# Altium PCB CoilGun_PCB.PcbDoc (part 2 of 2)
Units mm, origin at the board's own origin, x right, y up, seen from the top; angles counter-clockwise.
Board outline 78 x 72 mm, 2 copper layers (Top Layer, Bottom Layer), stack 1.594 mm thick; 79 components, 60 nets, 239 pads, 58 vias.
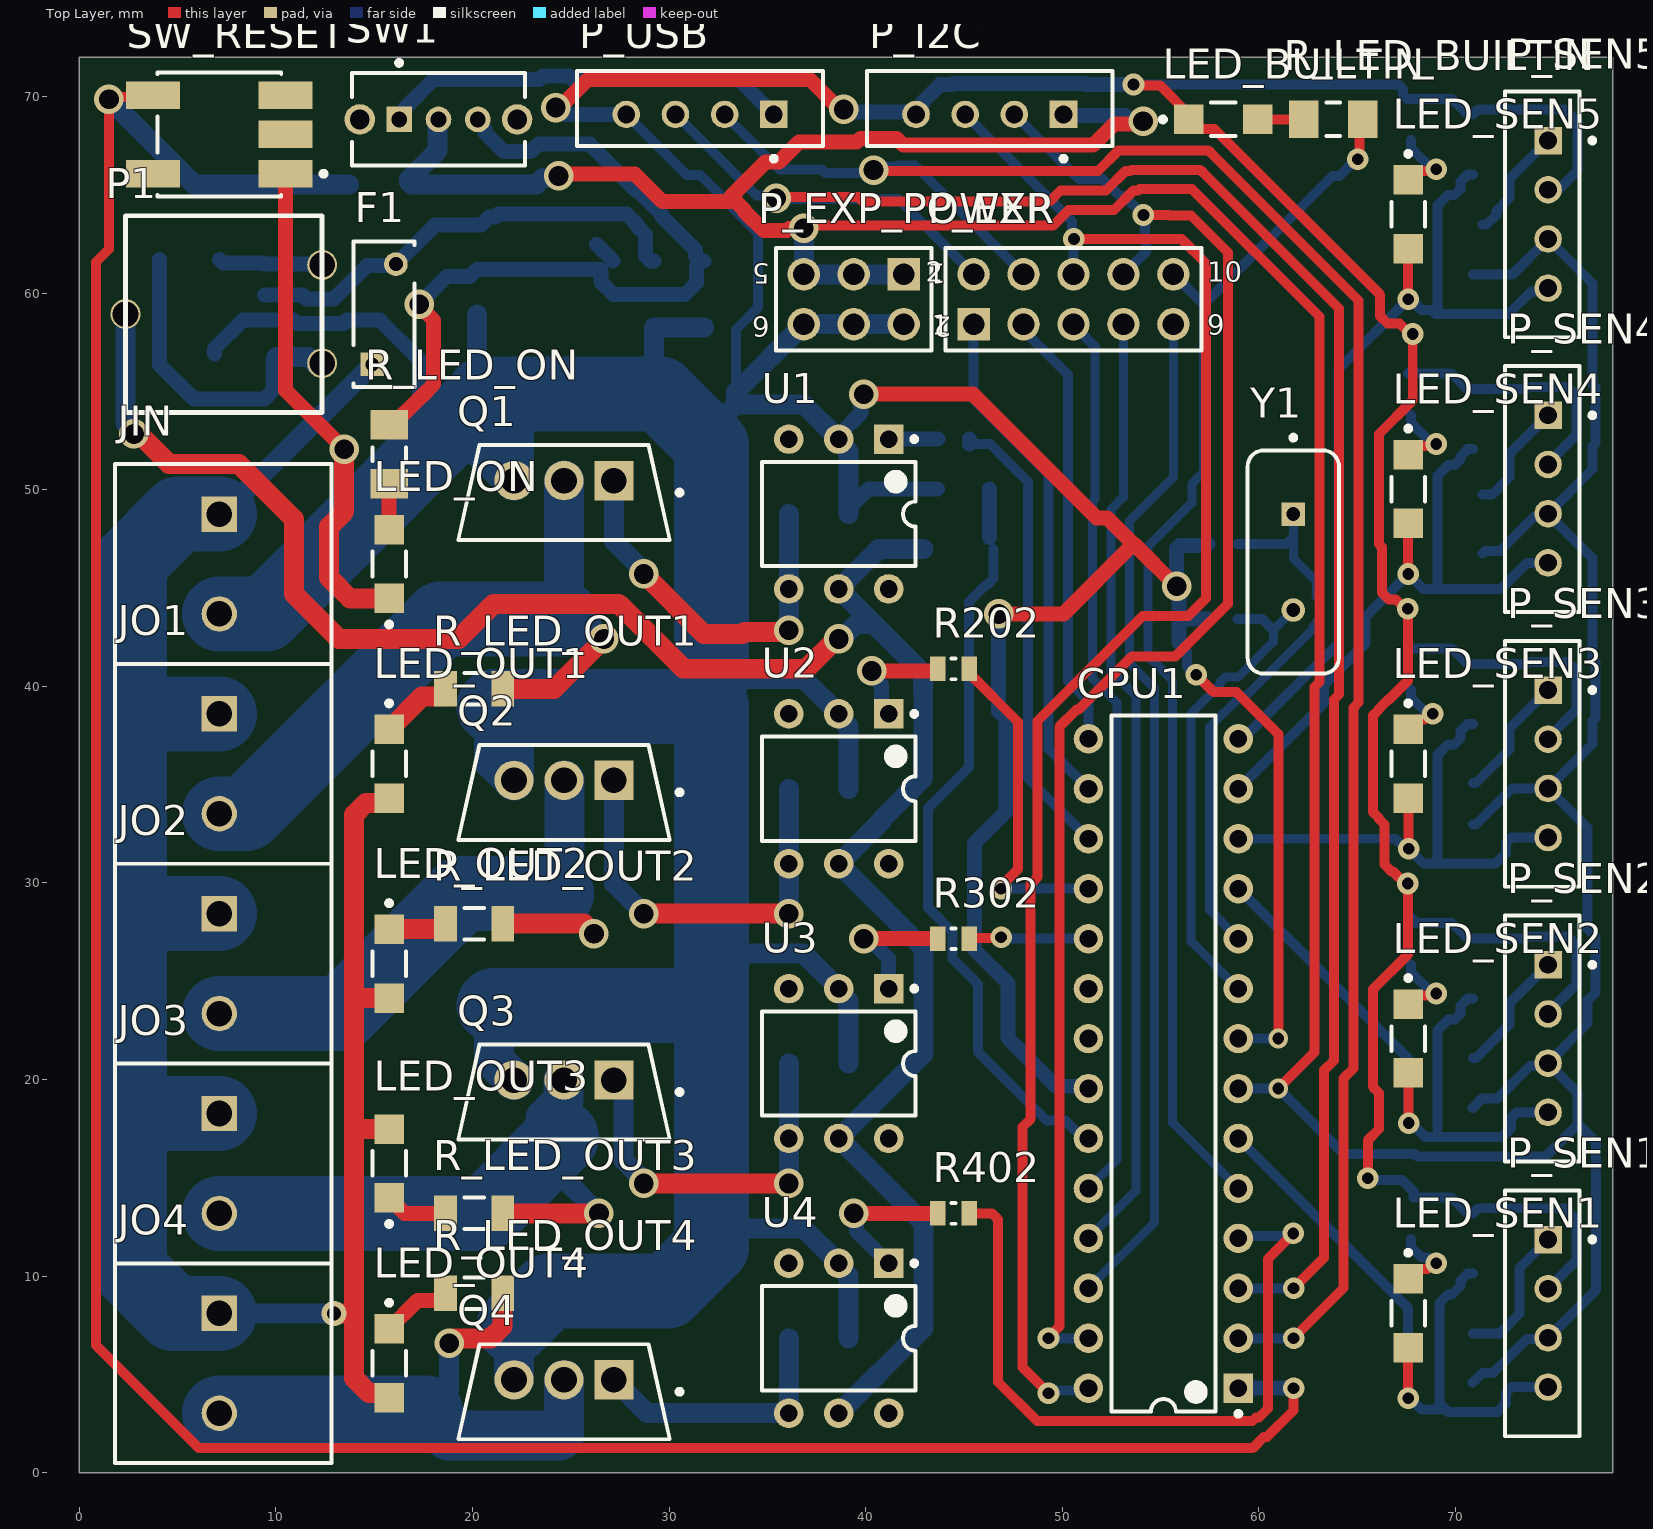
[diagram p0: Top Layer view]

## Via types
v1: diameter 1.5, hole 1, Top Layer to Bottom Layer, 28 vias
v2: diameter 1.1, hole 0.6, Top Layer to Bottom Layer, 27 vias
v3: diameter 1, hole 0.6, Top Layer to Bottom Layer, 2 vias
v4: diameter 1.27, hole 0.711, Top Layer to Bottom Layer, 1 vias

## Nets (pads, with @x,y where several pads share a name; then routed paths per layer and width w, separated by ;. In a path a pad name is that pad's centre, name@x,y a point inside that pad or via, vN(x,y) a via of type N, cw(c..) or ccw(c..) an arc to the next point about the centre after c; other vN are vias at no path point) (continued)
NetQ1_1: (continued)
  Top Layer w1.016: v1(28.724,45.712) 31.772,42.664 33.735,42.664 33.834,42.763 35.997,42.763 v1(36.09,42.856)
  Bottom Layer w1.016: Q1.1 27.2,47.367 28.724,45.843 v1(28.724,45.712) ; v1(36.09,42.856) U1.4 R101.2
NetQ2_1: Q2.1 R201.2 U2.4 | length 21.1
  Top Layer w1.016: v1(28.724,28.44) v1(36.09,28.44)
  Bottom Layer w1.016: Q2.1 27.2,29.969 28.724,28.445 v1(28.724,28.44) ; v1(36.09,28.44) U2.4 R201.2
NetQ3_1: Q3.1 R301.2 U3.4 | length 19.4
  Top Layer w1.016: v1(28.724,14.724) v1(36.09,14.724)
  Bottom Layer w1.016: Q3.1 27.686,19.495 27.686,15.893 28.724,14.855 v1(28.724,14.724) ; v1(36.09,14.724) U3.4 R301.2
NetQ4_1: Q4.1 R401.2 U4.4 | length 13.4
  Bottom Layer w1.016: Q4.1 28.901,3.04 U4.4 R401.2
NetR102_1: R102.1 U1.1 | length 2.5
  Bottom Layer w0.762: U1.1 R102.1
NetR202_1: R202.1 U2.1 | length 6
  Top Layer w0.762: v1(40.302,40.78) 43.653,40.78 43.672,40.799 R202.1
  Bottom Layer w0.762: v1(40.302,40.78) 40.302,40.581 40.801,40.082 40.801,38.969 U2.1
NetR302_1: R302.1 U3.1 | length 7
  Top Layer w0.762: v1(39.9,27.17) R302.1
  Bottom Layer w0.762: v1(39.9,27.17) 40.154,27.17 41.17,26.154 U3.1
NetR402_1: R402.1 U4.1 | length 7.6
  Top Layer w0.762: v1(39.392,13.2) R402.1
  Bottom Layer w0.762: v1(39.392,13.2) 39.533,13.059 39.533,12.297 U4.1
pads on no net: CPU1.20 CPU1.21 SW1.4 SW1.5 SW_RESET.2 SW_RESET.3 SW_RESET.5 U1.3 U1.6 U2.3 U2.6 U3.3 U3.6 U4.3 U4.6

## Silkscreen, mask and mechanical layers (free items; w line width, h text height)
Mechanical 1:
  the board outline again, w0.254

## Text inside footprints (layer, text, board x,y; h text height)
P_EXP: Top Overlay "2" at 43.058,60.582 h1.02; Top Overlay "1" at 43.358,57.882 h1.02; Top Overlay "9" at 57.378,57.882 h1.02; Top Overlay "10" at 57.378,60.582 h1.02
P_EXP_POWER: Top Overlay "1" at 44.062,61.482 h1.02 r180; Top Overlay "2" at 44.362,58.782 h1.02 r180; Top Overlay "5" at 35.122,61.482 h1.02 r180; Top Overlay "6" at 35.122,58.782 h1.02 r180